# Altium PCB PCB2.PcbDoc (part 1 of 3)
Units mil, origin at the board's own origin, x right, y up, seen from the top; angles counter-clockwise.
Board outline 2598.43 x 2874.02 mil, 2 copper layers (Top Layer, Bottom Layer); 202 components, 116 nets, 598 pads, 319 vias.
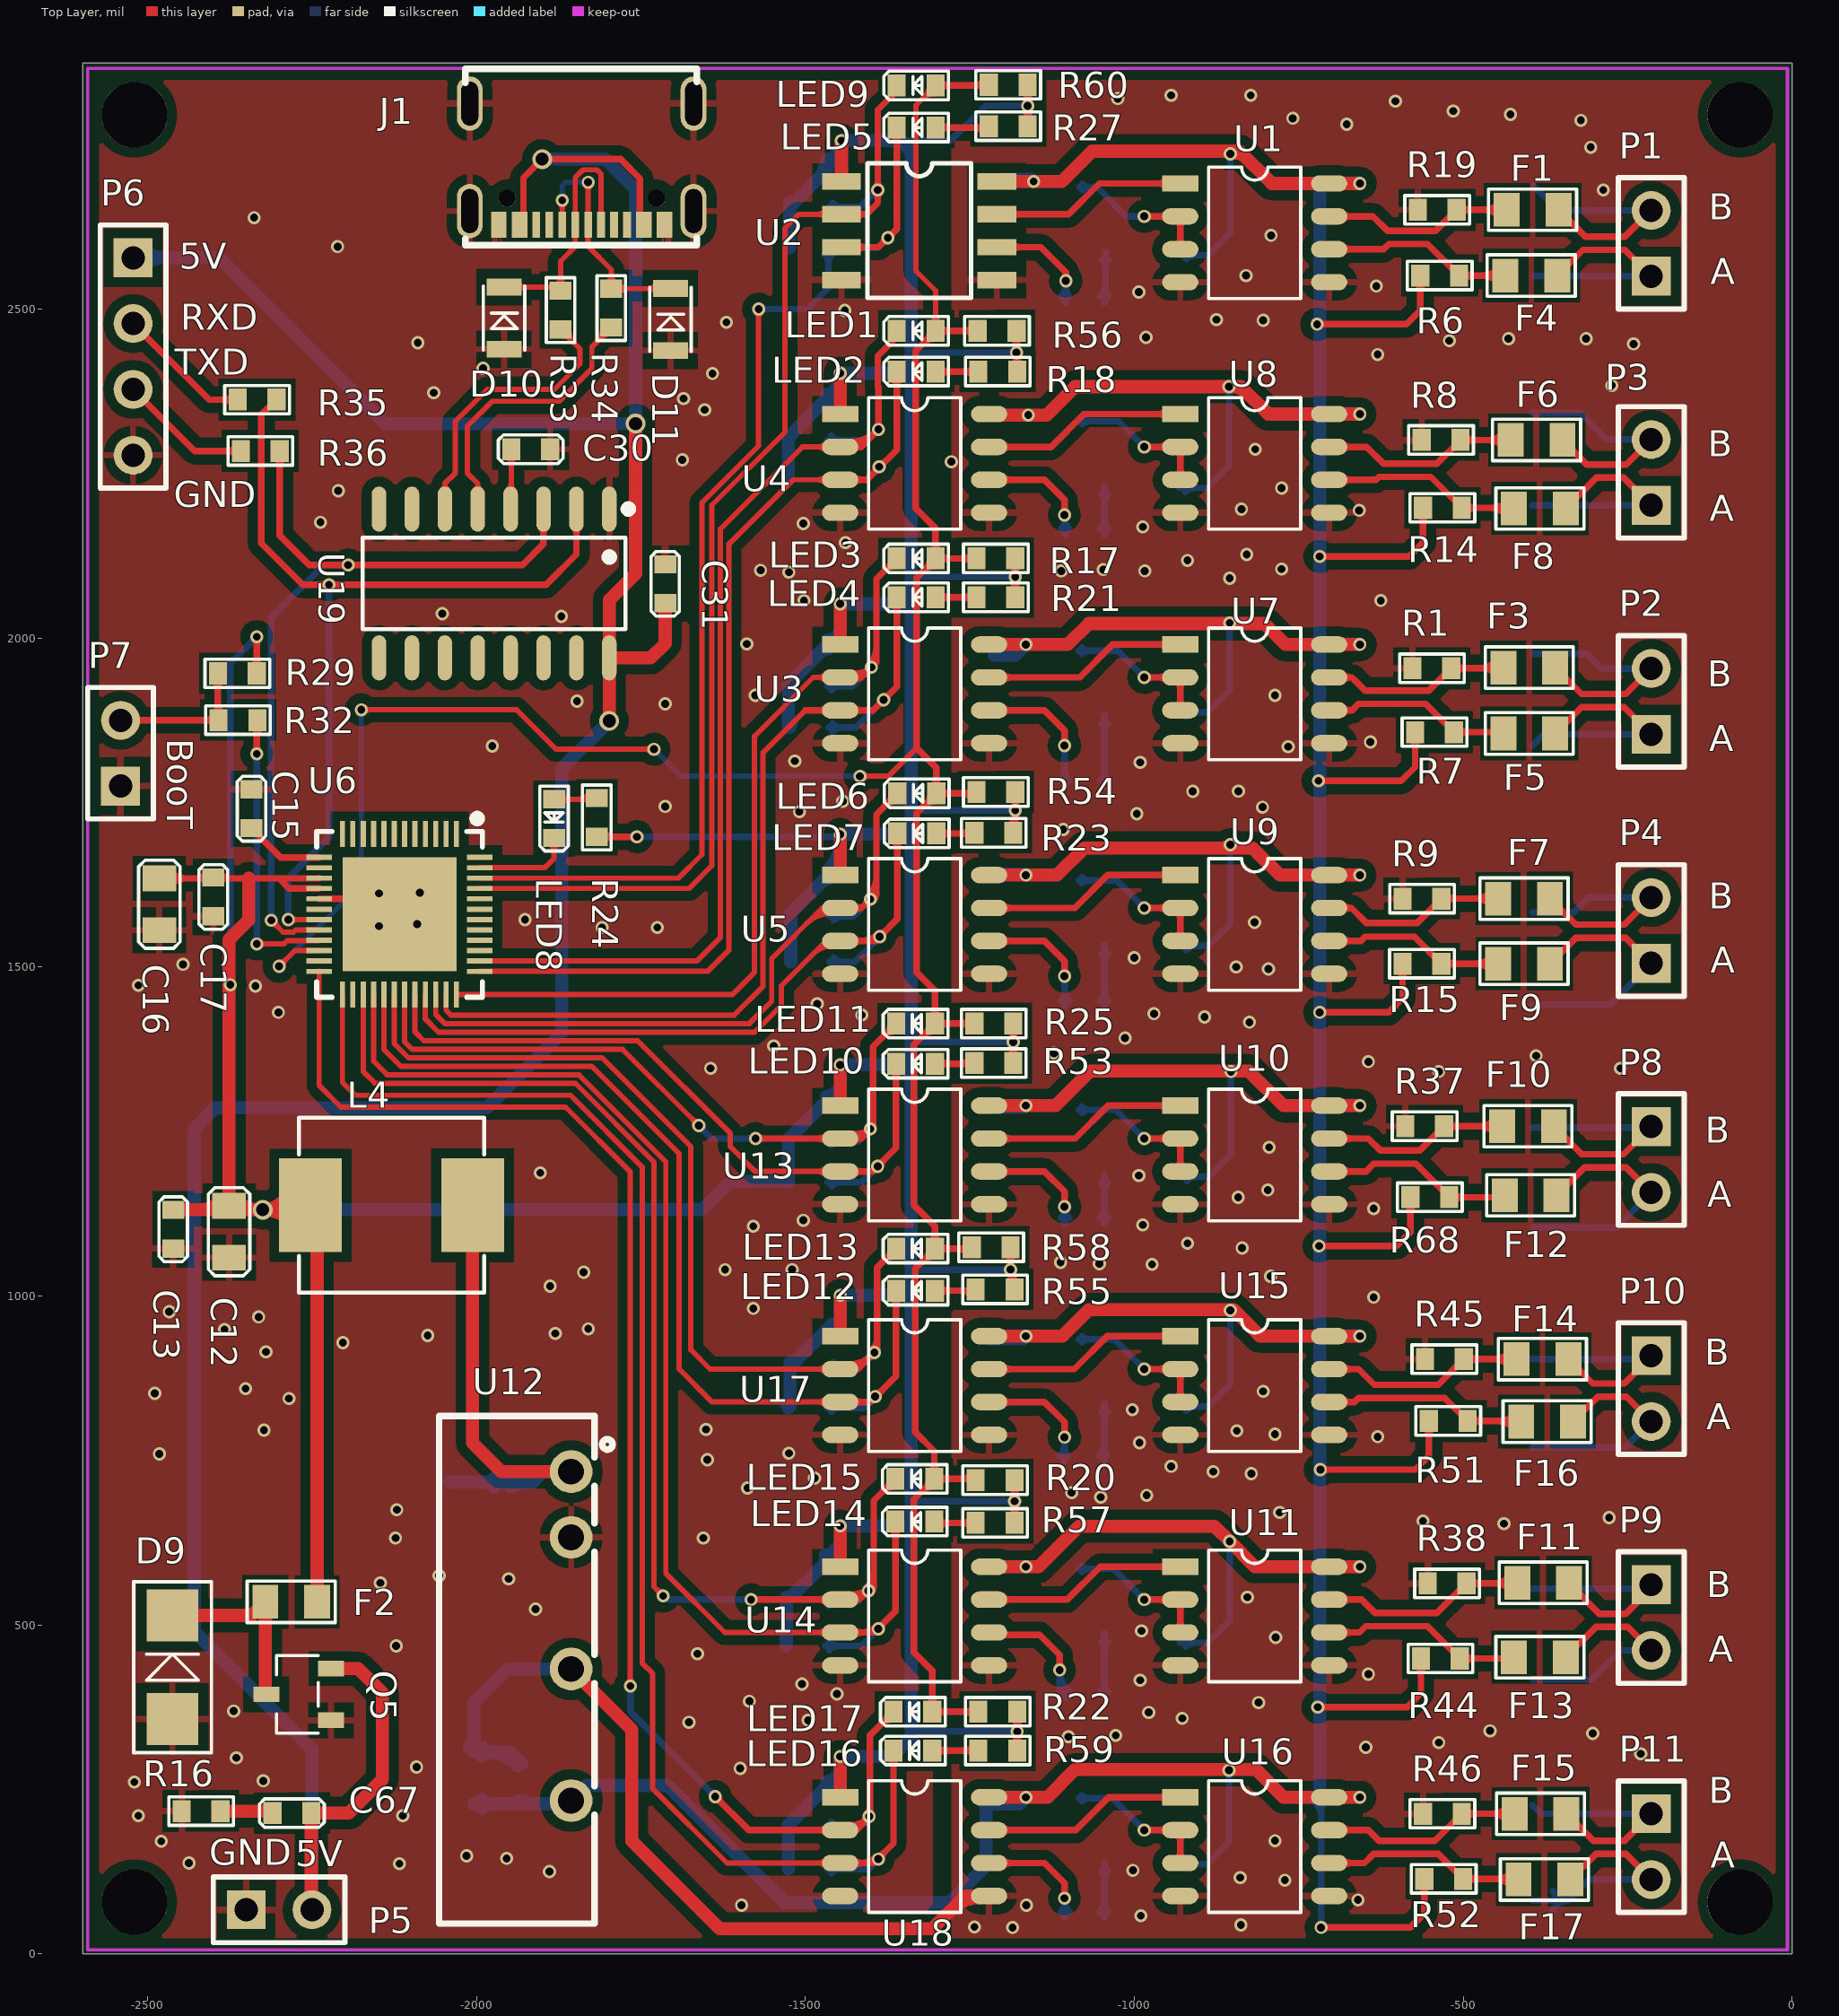
[diagram p0: Top Layer view]
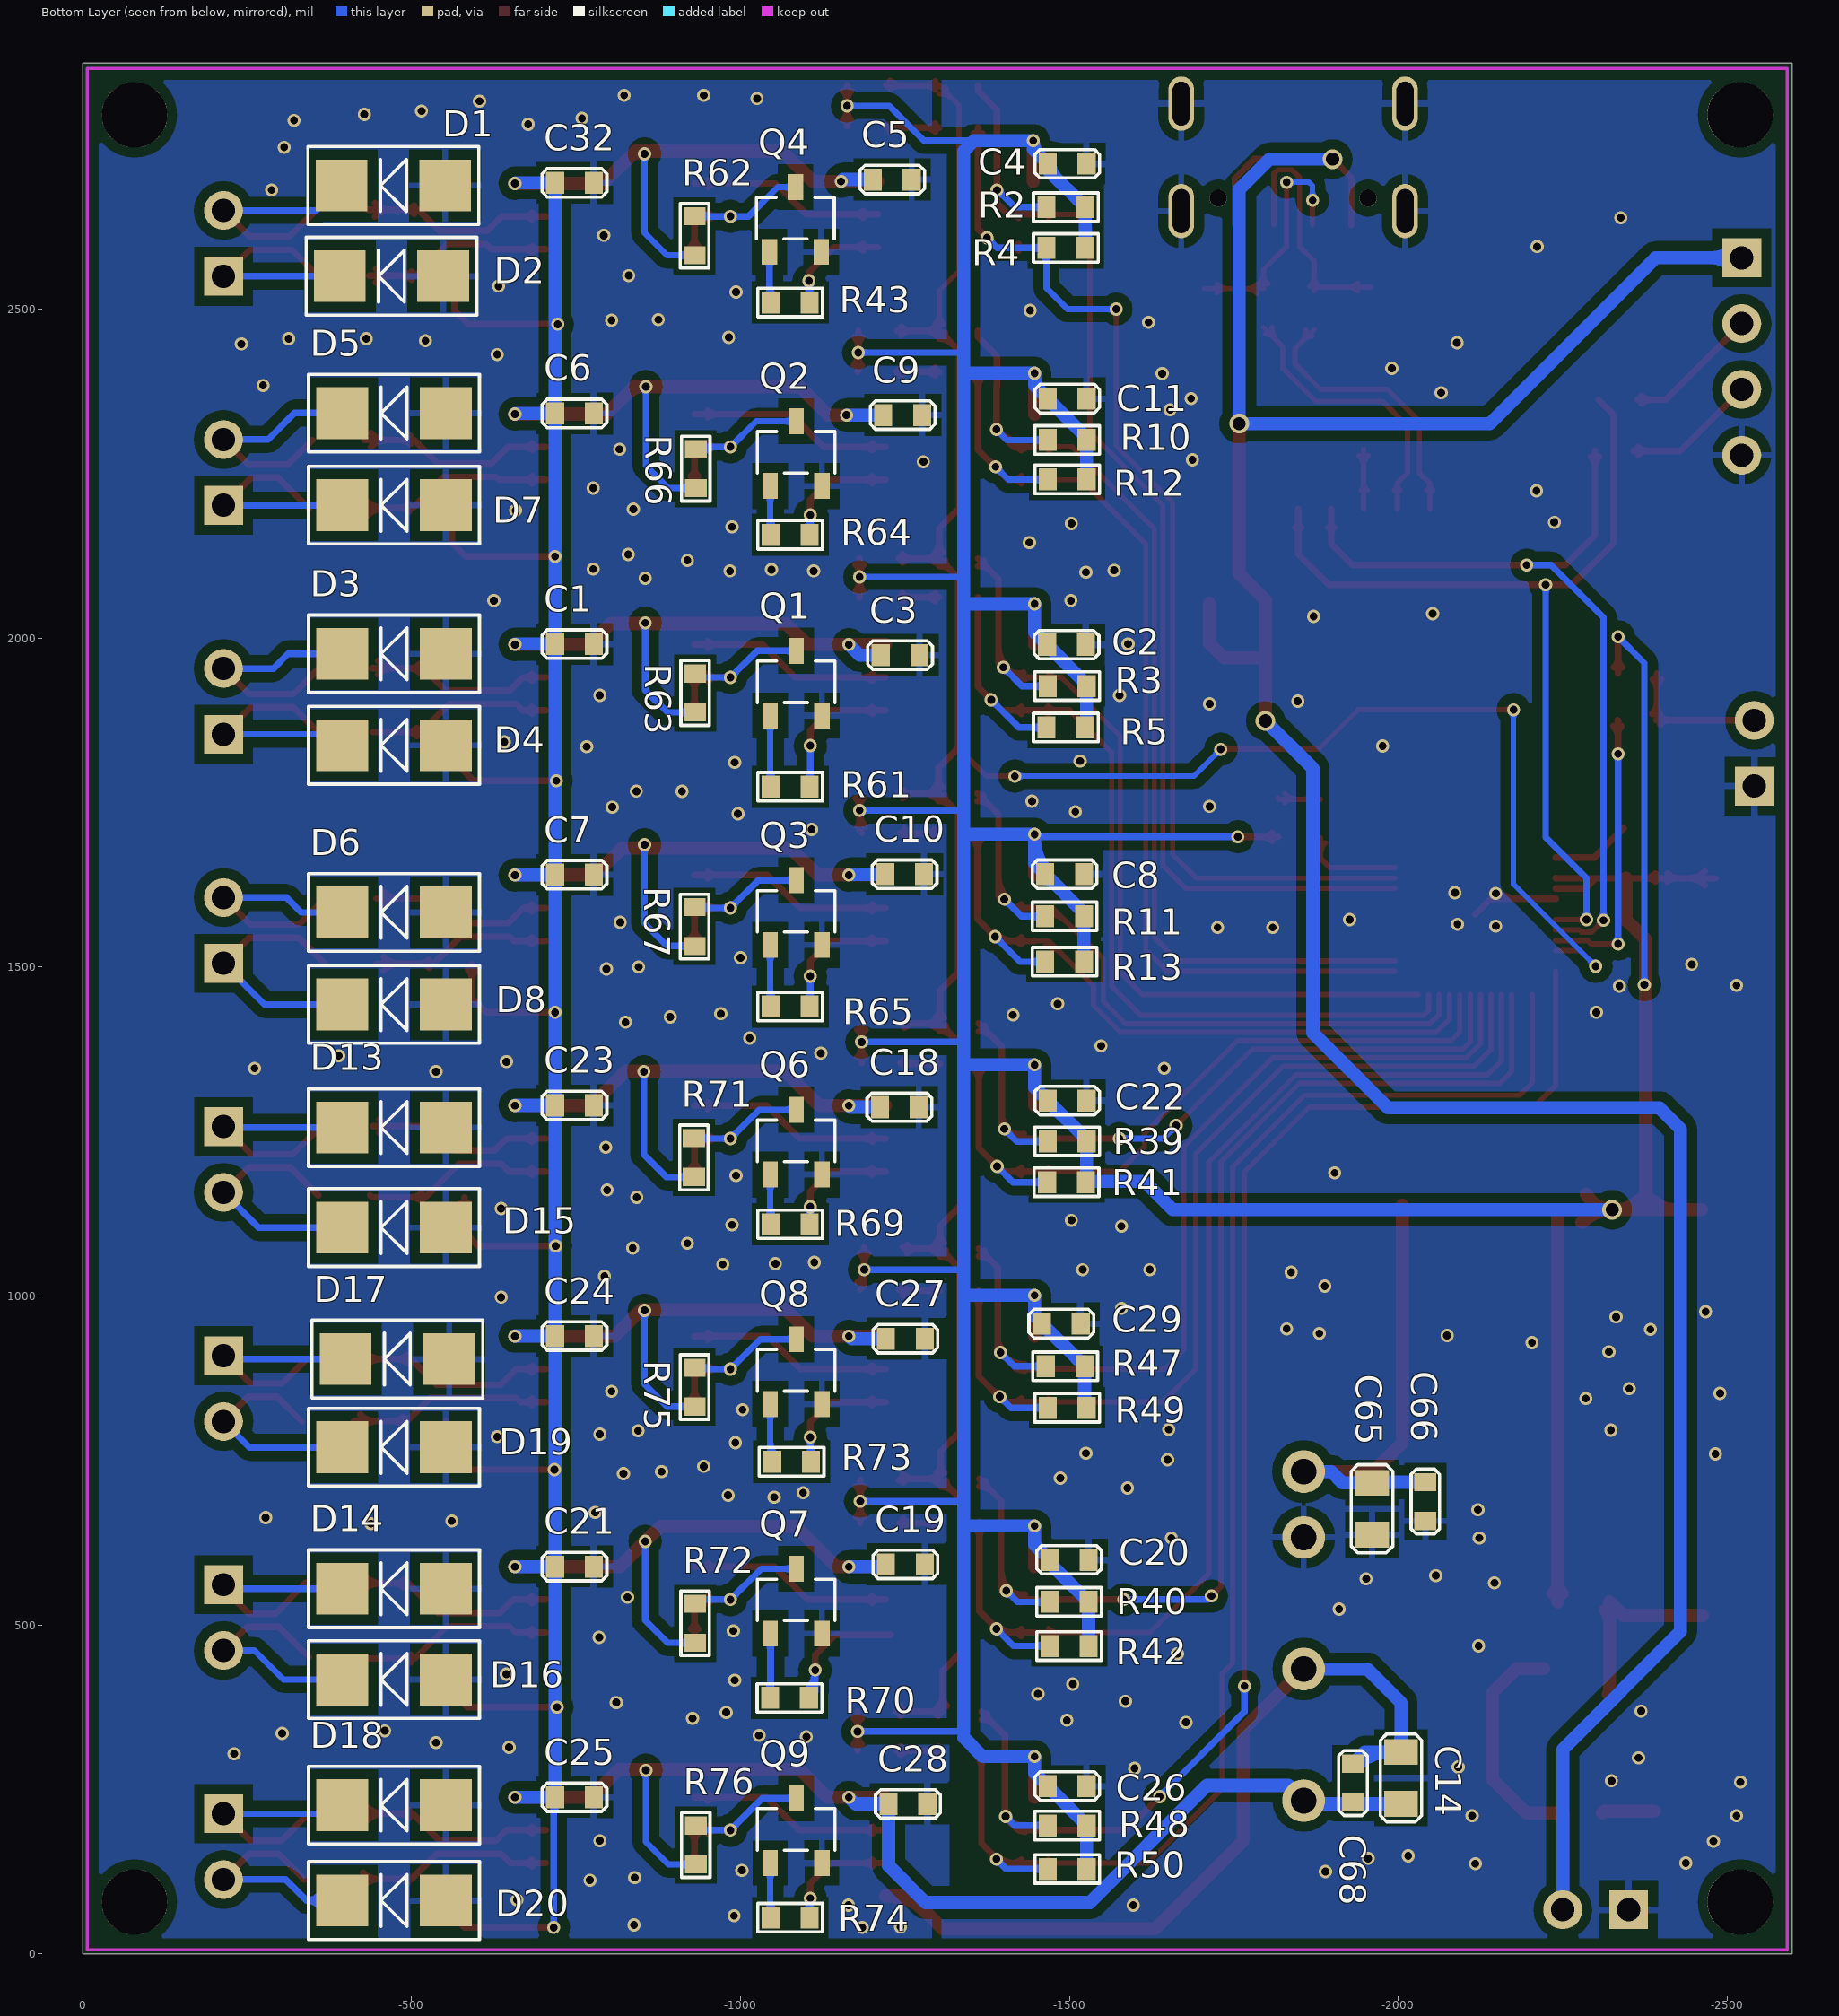
[diagram p1: Bottom Layer view, seen from below]

## Layer stack, top to bottom
Top Layer: signal copper 1.4
Dielectric: dielectric 12.6, FR-4, Dk 4.8
Bottom Layer: signal copper 1.4

## Board outline
-2598.43,0 0,0 0,2874.02 -2598.43,2874.02

## Design rules (kind name [scope] priority, off if disabled: settings)
Clearance Clearance_1 [InPolygon] p1: gap=15
Clearance [All] p2: gap=5
DiffPairsRouting [All] p1: maxlimit=10 minlimit=10 mostfreqgap=10 maxuncoupledlength=500
PolygonConnect PolygonConnect_1 [IsVia] p1: connectstyle=Direct reliefconductorwidth=10 reliefentries=4 polygonreliefangle="90 Angle"
PolygonConnect [All] p2: connectstyle=Relief reliefconductorwidth=10 reliefentries=4 polygonreliefangle="90 Angle"
RoutingVias [All] p1: holewidth=28 width=50 viastyle="Through Hole" minholewidth=28 minwidth=50 maxholewidth=28 maxwidth=50
SilkscreenOverComponentPads [All] p1: minsilkscreentomaskgap=1
SolderMaskExpansion [All] p1: expansion=4
Width [All] p1: maxlimit=200 minlimit=5 preferedwidth=10
26 further rules are at their usual default settings.

## Classes and differential pairs
component class Sheet2: C15 C16 C17 D10 D11 J1 LED1 LED2 LED3 LED4 LED5 LED6 LED7 LED8 LED9 LED10 LED11 LED12 LED13 LED14 LED15 LED16 LED17 P6 P7 R17 R18 R20 R21 R22 R23 R24 R25 R27 R29 R32 R33 R34 R35 R36 R53 R54 R55 R56 R57 R58 R59 R60 U6
component class rs485: C1 C2 C3 C4 C5 C6 C7 C8 C9 C10 C11 C12 C13 C14 C18 C19 C20 C21 C22 C23 C24 C25 C26 C27 C28 C29 C30 C31 C32 C65 C66 C67 C68 C70 D1 D2 D3 D4 D5 D6 D7 D8 D9 D13 D14 D15 D16 D17 D18 D19 D20 F1 F2 F3 F4 F5 F6 F7 F8 F9 F10 F11 F12 F13 F14 F15 F16 F17 L4 P1 P2 P3 P4 P5 P8 P9 P10 P11 Q1 Q2 Q3 Q4 Q5 Q6 Q7 Q8 Q9 R1 R2 R3 R4 R5 R6 R7 R8 R9 R10 R11 R12 R13 R14 R15 R16 R19 R37 R38 R39 R40 R41 R42 R43 R44 R45 R46 R47 R48 R49 R50 R51 R52 R61 R62 R63 R64 R65 R66 R67 R68 R69 R70 R71 R72 R73 R74 R75 R76 U1 U2 U3 U4 U5 U7 U8 U9 U10 U11 U12 U13 U14 U15 U16 U17 U18 U19
differential pair USB: +USB_P -USB_N
differential pair 4851: +4851_P -4851_N
differential pair 4852: +4852_P -4852_N
differential pair 4853: +4853_P -4853_N
differential pair 4854: +4854_P -4854_N
differential pair 4855: +4855_P -4855_N
differential pair 4856: +4856_P -4856_N
differential pair 4857: +4857_P -4857_N
differential pair 4858: +4858_P -4858_N

## Components (designator, comment, footprint, x,y, rotation, side; value= is the part's Value field where it differs from the comment)
C1 "0.1uF/50V/X5R" 0603C -777,1990.86 r0 bottom
C2 "0.1uF/50V/X5R" 0603C -1525,1990 r0 bottom
C3 "0.1uF/50V/X5R" 0603C -1272,1974 r0 bottom
C4 "0.1uF/50V/X5R" 0603C -1526,2721 r0 bottom
C5 "0.1uF/50V/X5R" 0603C -1260,2697 r0 bottom
C6 "0.1uF/50V/X5R" 0603C -777,2341.43 r0 bottom
C7 "0.1uF/50V/X5R" 0603C -777,1640.29 r0 bottom
C8 "0.1uF/50V/X5R" 0603C -1522.06,1641 r0 bottom
C9 "0.1uF/50V/X5R" 0603C -1276,2339 r0 bottom
C10 "0.1uF/50V/X5R" 0603C -1279,1641 r0 bottom
C11 "0.1uF/50V/X5R" 0603C -1526,2364 r0 bottom
C12 "10uF/25V" 0805C -2376,1137 r270 top
C13 "0.1uF" 0603C -2461,1131 r270 top
C14 "10uF/25V" 0805C -2004,228 r90 bottom
C15 "0.1uF" 0603C -2342,1770 r270 top
C16 "22uF/16V/X5R" 0805C -2482,1556 r90 top
C17 "0.1uF/50V/X5R" 0603C -2400,1577 r90 top
C18 "0.1uF/50V/X5R" 0603C -1271,1287 r0 bottom
C19 "0.1uF/50V/X5R" 0603C -1280,592 r0 bottom
C20 "0.1uF/50V/X5R" 0603C -1529,599 r0 bottom
C21 "0.1uF/50V/X5R" 0603C -777,588.57 r0 bottom
C22 "0.1uF/50V/X5R" 0603C -1526,1297 r0 bottom
C23 "0.1uF/50V/X5R" 0603C -777,1289.71 r0 bottom
C24 "0.1uF/50V/X5R" 0603C -777,939.14 r0 bottom
C25 "0.1uF/50V/X5R" 0603C -777,238 r0 bottom
C26 "0.1uF/50V/X5R" 0603C -1526,255 r0 bottom
C27 "0.1uF/50V/X5R" 0603C -1280,935 r0 bottom
C28 "0.1uF/50V/X5R" 0603C -1284,228 r0 bottom
C29 "0.1uF/50V/X5R" 0603C -1517,958 r0 bottom
C30 "0.1uF/50V/X5R" 0603C -1947,2287 r0 top
C31 "0.1uF/50V/X5R" 0603C -1713,2112 r270 top
C32 "0.1uF/50V/X5R" 0603C -777,2692 r0 bottom
C65 "3.3uF" 0805C -1960,716 r270 bottom
C66 "0.1uF" 0603C -2041,717 r270 bottom
C67 "10uF" 0603C -2251,214 r180 top
C68 "0.1uF" 0603C -1931,230 r90 bottom
D1 "SMAJ6.5CA" SMA -551,2688 r0 bottom
D2 "SMAJ6.5CA" SMA -548,2550 r0 bottom
D3 "SMAJ6.5CA" SMA -552,1976 r0 bottom
D4 "SMAJ6.5CA" SMA -552,1837 r0 bottom
D5 "SMAJ6.5CA" SMA -552,2342 r0 bottom
D6 "SMAJ6.5CA" SMA -552,1583 r0 bottom
D7 "SMAJ6.5CA" SMA -552,2202 r0 bottom
D8 "SMAJ6.5CA" SMA -552,1443 r0 bottom
D9 "SMAJ5.0CA" SMA -2462,357 r90 top
D10 "CESDB5V0D3" SOD323 -1958,2439 r90 top
D11 "CESDB5V0D3" SOD323 -1705,2437 r90 top
D13 "SMAJ6.5CA" SMA -552,1256 r0 bottom
D14 "SMAJ6.5CA" SMA -552,555 r0 bottom
D15 "SMAJ6.5CA" SMA -552,1104 r0 bottom
D16 "SMAJ6.5CA" SMA -552,417 r0 bottom
D17 "SMAJ6.5CA" SMA -557,904 r0 bottom
D18 "SMAJ6.5CA" SMA -552,226 r0 bottom
D19 "SMAJ6.5CA" SMA -552,770 r0 bottom
D20 "SMAJ6.5CA" SMA -552,81 r0 bottom
F1 "100mA" 0805R -355,2651 r180 top
F2 "SMD0805P050" 0805R -2321,535 r0 top
F3 "100mA" 0805R -360,1955 r180 top
F4 "100mA" 0805R -357,2551 r180 top
F5 "100mA" 0805R -360,1855 r180 top
F6 "100mA" 0805R -349,2301 r180 top
F7 "100mA" 0805R -368,1604 r180 top
F8 "100mA" 0805R -344,2197 r180 top
F9 "100mA" 0805R -368,1505 r180 top
F10 "100mA" 0805R -362,1258 r180 top
F11 "100mA" 0805R -339,564 r180 top
F12 "100mA" 0805R -358,1153 r180 top
F13 "100mA" 0805R -344,451 r180 top
F14 "100mA" 0805R -340,904 r180 top
F15 "100mA" 0805R -343,213 r180 top
F16 "100mA" 0805R -333,809 r180 top
F17 "100mA" 0805R -337,113 r180 top
J1 "TYPE C_16P" TYPEC_16P -1840,2797 r180 top
L4 "47uH" IND-SMD_L7.0-W6.6_FXL0630 -2129,1138 r180 top
LED1 "LED" 0603LED -1302,2467 r180 top
LED2 "LED" 0603LED -1302,2405 r180 top
LED3 "LED" 0603LED -1302,2121 r180 top
LED4 "LED" 0603LED -1302,2062 r180 top
LED5 "LED" 0603LED -1302,2776 r180 top
LED6 "LED" 0603LED -1301,1764 r180 top
LED7 "LED" 0603LED -1301,1703 r180 top
LED8 "LED" 0603LED -1882,1755 r270 top
LED9 "LED" 0603LED -1302,2840 r180 top
LED10 "LED" 0603LED -1303,1353 r180 top
LED11 "LED" 0603LED -1303,1414 r180 top
LED12 "LED" 0603LED -1303,1008 r180 top
LED13 "LED" 0603LED -1303,1072 r180 top
LED14 "LED" 0603LED -1304,657 r180 top
LED15 "LED" 0603LED -1304,722 r180 top
LED16 "LED" 0603LED -1307,309 r180 top
LED17 "LED" 0603LED -1307,368 r180 top
P1 "Header 2" HDR1X2 -214,2550 r90 top
P2 "Header 2" HDR1X2 -214,1853.71 r90 top
P3 "Header 2" HDR1X2 -214,2201.86 r90 top
P4 "Header 2" HDR1X2 -214,1505.57 r90 top
P5 "Header 2" HDR1X2 -2350,67 r0 top
P6 "Header 4" HDR1X4 -2522,2578 r270 top
P7 "Header 2" HDR1X2 -2541,1775 r90 top
P8 "Header 2" HDR1X2 -214,1257.43 r270 top
P9 "Header 2" HDR1X2 -214,561.14 r270 top
P10 "Header 2" HDR1X2 -214,909.29 r270 top
P11 "Header 2" HDR1X2 -214,213 r270 top
Q1 "S8050" sot23-3 -1045,1882.29 r270 bottom
Q2 "S8050" sot23-3 -1045,2231.14 r270 bottom
Q3 "S8050" sot23-3 -1045,1533.43 r270 bottom
Q4 "S8050" sot23-3 -1044,2587 r270 bottom
Q5 "SI2301" sot23-3 -2221,355 r0 top
Q6 "S8050" sot23-3 -1045,1184.57 r270 bottom
Q7 "S8050" sot23-3 -1045,486.86 r270 bottom
Q8 "S8050" sot23-3 -1045,835.71 r270 bottom
Q9 "S8050" sot23-3 -1045,138 r270 bottom
R1 "10k" 0603r -577,1954 r0 top
R2 "10k" 0603r -1524,2655 r0 bottom
R3 "10k" 0603r -1526,1927 r0 bottom
R4 "10k" 0603r -1524,2593 r0 bottom
R5 "10k" 0603r -1524,1864 r0 bottom
R6 "10k" 0603r -506,2551 r180 top
R7 "10k" 0603r -514,1857 r180 top
R8 "10k" 0603r -563,2301 r0 top
R9 "10k" 0603r -592,1604 r0 top
R10 "10k" 0603r -1526,2301 r0 bottom
R11 "10k" 0603r -1522.06,1577 r0 bottom
R12 "10k" 0603r -1526,2241 r0 bottom
R13 "10k" 0603r -1522.06,1508 r0 bottom
R14 "10k" 0603r -502,2198 r180 top
R15 "10k" 0603r -533,1505 r180 top
R16 "10k" 0603r -2389,217 r180 top
R17 "2K" 0603R -1240,2121 r0 top
R18 "2K" 0603R -1237,2405 r0 top
R19 "10k" 0603r -569,2651 r0 top
R20 "2K" 0603R -1241,720 r0 top
R21 "2K" 0603R -1240,2062 r0 top
R22 "2K" 0603R -1237,368 r0 top
R23 "2K" 0603R -1243,1704 r0 top
R24 "2K" 0603R -1817,1757 r270 top
R25 "2K" 0603R -1243,1414 r0 top
R27 "2K" 0603R -1221,2778 r0 top
R29 "10k" 0603r -2334,1946.35 r180 top
R32 "10k" 0603r -2392,1875.35 r0 top
R33 "10k" 0603r -1872,2469 r90 top
R34 "10k" 0603r -1795,2472 r90 top
R35 "10k" 0603r -2304,2362.35 r180 top
R36 "10k" 0603r -2299,2284.35 r180 top
R37 "10k" 0603r -588,1258 r0 top
R38 "10k" 0603r -554,563 r0 top
R39 "10k" 0603r -1526,1235 r0 bottom
R40 "10k" 0603r -1529,535 r0 bottom
R41 "10k" 0603r -1525,1173 r0 bottom
R42 "10k" 0603r -1529,468 r0 bottom
R43 "10k" 0603r -1105,2510 r0 bottom
R44 "10k" 0603r -505,449 r180 top
R45 "10k" 0603r -558,904 r0 top
R46 "10k" 0603r -561,213 r0 top
R47 "10k" 0603r -1523,893 r0 bottom
R48 "10k" 0603r -1526,195 r0 bottom
R49 "10k" 0603r -1526,830 r0 bottom
R50 "10k" 0603r -1526,129 r0 bottom
R51 "10k" 0603r -493,810 r180 top
R52 "10k" 0603r -500,114 r180 top
R53 "2K" 0603R -1243,1354 r0 top
R54 "2K" 0603R -1240,1766 r0 top
R55 "2K" 0603R -1241,1010 r0 top
R56 "2K" 0603R -1238,2467 r0 top
R57 "2K" 0603R -1241,655 r0 top
R58 "2K" 0603R -1247,1074 r0 top
R59 "2K" 0603R -1237,309 r0 top
R60 "2K" 0603R -1221,2841 r0 top
R61 "10k" 0603r -1105,1774 r0 bottom
R62 "10k" 0603r -930,2641 r270 bottom
R63 "10k" 0603r -931,1946 r270 bottom
R64 "10k" 0603r -1105,2157 r0 bottom
R65 "10k" 0603r -1105,1440 r0 bottom
R66 "10k" 0603r -932,2287 r270 bottom
R67 "10k" 0603r -930,1591 r270 bottom
R68 "10k" 0603r -521,1150 r180 top
R69 "10k" 0603r -1105,1109 r0 bottom
R70 "10k" 0603r -1104,389 r0 bottom
R71 "10k" 0603r -929,1240 r270 bottom
R72 "10k" 0603r -931,532 r270 bottom
R73 "10k" 0603r -1107,748 r0 bottom
R74 "10k" 0603r -1105,55 r0 bottom
R75 "10k" 0603r -930,891 r270 bottom
R76 "10k" 0603r -932,195 r270 bottom
U1 "SP485R" so-8 -930,2691 r0 top
U2 "ADUM1201ARZ-RL7" SO8 -1445.7,2693.73 r0 top
U3 "ADUM1201ARZ-RL7" SO-8 -1447,1990.14 r0 top
U4 "ADUM1201ARZ-RL7" SO-8 -1447,2340.57 r0 top
U5 "ADUM1201ARZ-RL7" SO-8 -1447,1639.71 r0 top
U6 "STC8H8K64U-45I-QFN48" QFN-48_L6.0-W6.0-P0.40-TL-EP4.4 -2117,1580 r270 top
U7 "SP485R" so-8 -930,1990.14 r0 top
U8 "SP485R" so-8 -930,2340.57 r0 top
U9 "SP485R" so-8 -930,1639.71 r0 top
U10 "SP485R" so-8 -930,1289.29 r0 top
U11 "SP485R" so-8 -930,588.43 r0 top
U12 "B0505LS-1W" PWRM-TH_4P-L19.7-W6.0-P2.54 -1856,483 r270 top
U13 "ADUM1201ARZ-RL7" SO-8 -1447,1289.29 r0 top
U14 "ADUM1201ARZ-RL7" SO-8 -1447,588.43 r0 top
U15 "SP485R" so-8 -930,938.86 r0 top
U16 "SP485R" so-8 -930,238 r0 top
U17 "ADUM1201ARZ-RL7" SO-8 -1447,938.86 r0 top
U18 "ADUM1201ARZ-RL7" SO-8 -1447,238 r0 top
U19 "CH340C" SOP-16_L10.0-W3.9-P1.27-LS6.0-BL -1973,2083 r180 top

## Footprints (in the part's own frame and the unit in brackets; to place one, negate y for a bottom-side part, rotate by r counter-clockwise, add the part's x,y. Pads: shape width x height; smd on the part's side, far side on the other; paste and mask are expansions set on the pad)
0603C [mm]
  rect 0.7x0.85 smd: 1(0,0) 2(1.5,0)
  silkscreen extent -0.5,-0.55 2,0.55
0603LED [mm]
  rect 0.7x0.85 smd: 1(0,0) 2(1.5,0)
  silkscreen extent -0.5,-0.55 2,0.55
0603r [mm]
  rect 0.7x0.85 smd: 1(0,0) 2(1.5,0)
  silkscreen extent -0.5,-0.55 2,0.55
0603R [mm]
  rect 0.7x0.85 smd: 1(0,0) 2(1.5,0)
  silkscreen extent -0.5,-0.55 2,0.55
0805C [mm]
  rect 1x1.3 smd: 1(0,0) 2(2,0)
  silkscreen extent -0.7,-0.8 2.7,0.8
0805R [mm]
  rect 1x1.3 smd: 1(0,0) 2(2,0)
  silkscreen extent -0.7,-0.8 2.7,0.8
HDR1X2 [mm] "Connector; Header; 2 Position"
  rect 1.5x1.5 hole 0.9: 1(0,0)
  round 1.5 hole 0.9: 2(2.54,0)
  silkscreen extent -1.27,-1.27 3.81,1.27
HDR1X4 [mm] "Connector; Header; 4 Position"
  rect 1.5x1.5 hole 0.9: 1(0,0)
  round 1.5 hole 0.9: 2(2.54,0) 3(5.08,0) 4(7.62,0)
  silkscreen extent -1.27,-1.27 8.89,1.27
IND-SMD_L7.0-W6.6_FXL0630 [mm]
  rect 2.424x3.62 smd: 1(3.128,0) 2(-3.128,0)
  silkscreen extent -3.58,-3.38 3.58,3.38
PWRM-TH_4P-L19.7-W6.0-P2.54 [mm]
  round 1.65 hole 1 paste+0 mask+0.05: 1(-6.35,0) 2(-3.81,0) 4(1.27,0) 6(6.35,0)
  silkscreen extent -8.5,-5.1 11.1,1.6
QFN-48_L6.0-W6.0-P0.40-TL-EP4.4 [mm]
  rect 1x0.2 smd paste-100 mask+0.05: 1(-3.1,2.2) 2(-3.1,1.8) 3(-3.1,1.4) 4(-3.1,1) 5(-3.1,0.6) 6(-3.1,0.2) 7(-3.1,-0.2) 8(-3.1,-0.6) 9(-3.1,-1) 10(-3.1,-1.4) 11(-3.1,-1.8) 12(-3.1,-2.2) 25(3.1,-2.2) 26(3.1,-1.8) 27(3.1,-1.4) 28(3.1,-1) 29(3.1,-0.6) 30(3.1,-0.2) 31(3.1,0.2) 32(3.1,0.6) 33(3.1,1) 34(3.1,1.4) 35(3.1,1.8) 36(3.1,2.2)
  rect 0.2x1 smd paste-100 mask+0.05: 13(-2.2,-3.1) 14(-1.8,-3.1) 15(-1.4,-3.1) 16(-1,-3.1) 17(-0.6,-3.1) 18(-0.2,-3.1) 19(0.2,-3.1) 20(0.6,-3.1) 21(1,-3.1) 22(1.4,-3.1) 23(1.8,-3.1) 24(2.2,-3.1) 37(2.2,3.1) 38(1.8,3.1) 39(1.4,3.1) 40(1,3.1) 41(0.6,3.1) 42(0.2,3.1) 43(-0.2,3.1) 44(-0.6,3.1) 45(-1,3.1) 46(-1.4,3.1) 47(-1.8,3.1) 48(-2.2,3.1)
  rect 4.4x4.4 smd paste-100 mask+0.05: 49(0.001,0.001)
  silkscreen extent -3.85,-3.2 3.2,3.2
SMA [mm]
  rect 2x2 smd: 1(0,0) 2(4,0)
  silkscreen extent -1.3,-1.5 5.3,1.5
SO8 [mm]
  rect 1.5x0.635 smd: 1(0.018,0.011) 2(0.018,-1.259) 3(0.018,-2.529) 4(0.018,-3.799) 5(6.018,-3.799) 6(6.018,-2.529) 7(6.018,-1.259) 8(6.018,0.011)
  silkscreen extent 1.02,-4.49 5.02,0.71
so-8 [mil]
  rect 55x25 smd: 1(0,0)
  oval 55x25 smd: 2(0,-50) 3(0,-100) 4(0,-150) 5(226.38,-150) 6(226.38,-100) 7(226.38,-50) 8(226.38,0)
  silkscreen extent 43,-175 183,25
SO-8 [mil]
  rect 55x25 smd: 1(0,0)
  oval 55x25 smd: 2(0,-50) 3(0,-100) 4(0,-150) 5(226.38,-150) 6(226.38,-100) 7(226.38,-50) 8(226.38,0)
  silkscreen extent 43,-175 183,25
SOD323 [mm]
  rect 0.65x1.35 smd: 1(0,0) 2(2.4,0)
  silkscreen extent -0.03,-0.8 2.44,0.8
SOP-16_L10.0-W3.9-P1.27-LS6.0-BL [mm]
  oval 0.56x1.745 smd: 1(-4.445,-2.872) 2(-3.175,-2.872) 3(-1.905,-2.872) 4(-0.635,-2.872) 5(0.635,-2.872) 6(1.905,-2.872) 7(3.175,-2.872) 8(4.445,-2.872) 9(4.445,2.872) 10(3.175,2.872) 11(1.905,2.872) 12(0.635,2.872) 13(-0.635,2.872) 14(-1.905,2.872) 15(-3.175,2.872) 16(-4.445,2.872)
  silkscreen extent -5.33,-3.02 5.08,1.77
sot23-3 [mm]
  rect 1x0.6 smd: 1(0,0) 2(0,2) 3(-2.5,1)
  silkscreen extent -2.1,-0.5 -0.5,2.5
TYPEC_16P [mm]
  oval 1x2.1 hole 0.65 slot 1.7 at 90 deg: 1(-4.32,3.759) 1(-4.32,-0.391) 1(4.32,3.759) 1(4.32,-0.391)
  round 0.67 hole 0.67: 2(-2.89,3.259) 2(2.89,3.259)
  rect 0.3x1 smd: A1(-3.05,4.293) A4(-2.25,4.293) A5(-1.25,4.293) A6(-0.25,4.293) A7(0.25,4.293) A8(1.25,4.293) A9(2.25,4.293) A12(3.35,4.293) B1(3.05,4.293) B4(2.55,4.293) B5(1.75,4.293) B6(0.75,4.293) B7(-0.75,4.293) B8(-1.75,4.293) B9(-2.55,4.293) B12(-3.35,4.293)
  silkscreen extent -4.45,-1.73 4.49,5.07

## Part data
C1 C2 C3 C4 C5 C6 C7 C8 C9 C10 C11 C16 C17 C18 C19 C20 C21 C22 C23 C24 C25 C26 C27 C28 C29 C30 C31 C32: library part CAP4, "贴片电容 20%"
C12 C13 C14 C15 C65 C66 C67 C68: library part CAP, "Capacitor"
D1 D2 D3 D4 D5 D6 D7 D8 D9 D10 D11 D13 D14 D15 D16 D17 D18 D19 D20: library part "DIODE S", "Schottky Diode"
F1 F3 F4 F5 F6 F7 F8 F9 F10 F11 F12 F13 F14 F15 F16 F17: library part RES2
F2: library part "Fuse 2", "Fuse"
L4: library part INDUCTOR
P1 P2 P3 P4 P5 P7 P8 P9 P10 P11: "Header, 2-Pin"
P6: "Header, 4-Pin"
Q1 Q2 Q3 Q4 Q6 Q7 Q8 Q9: library part NPN, "NPN Bipolar Transistor"
Q5: library part MOSFET-P, "P-Channel MOSFET"
R1 R2 R3 R4 R5 R6 R7 R8 R9 R10 R11 R12 R13 R14 R15 R16 R19 R29 R32 R33 R34 R35 R36 R37 R38 R39 R40 R41 R42 R43 R44 R45 R46 R47 R48 R49 R50 R51 R52 R61 R62 R63 R64 R65 R66 R67 R68 R69 R70 R71 R72 R73 R74 R75 R76: library part Resistor_0603
R17 R18 R20 R21 R22 R23 R24 R25 R27 R53 R54 R55 R56 R57 R58 R59 R60: library part RES1
U1 U7 U8 U9 U10 U11 U15 U16: library part SN65HVD06D
U12: library part B0505S

## Free pads (board coordinates)
  round 99.61 hole 99.61 unplated: 0(-2519.68,78.74) 0(-2519.68,2795.28) 0(-78.74,78.74) 0(-78.74,2795.28)

## Via types
v1: diameter 20, hole 12, Top Layer to Bottom Layer, tented both sides, 315 vias
v2: diameter 30, hole 20, Top Layer to Bottom Layer, tented both sides, 4 vias

## Nets (pads, with @x,y where several pads share a name; then routed paths per layer and width w, separated by ;. In a path a pad name is that pad's centre, name@x,y a point inside that pad or via, vN(x,y) a via of type N, cw(c..) or ccw(c..) an arc to the next point about the centre after c; other vN are vias at no path point)
5V_OUT1: C2.2 C4.2 C8.2 C11.2 C12.1 C13.1 C16.2 C17.2 C20.2 C22.2 C26.2 C29.2 F2.2 L4.1 R2.1 R3.1 R4.1 R5.1 R10.1 R11.1 R12.1 R13.1 R17.2 R18.2 R20.2 R21.2 R22.2 R23.2 R24.2 R25.2 R27.2 R29.1 R39.1 R40.1 R41.1 R42.1 R47.1 R48.1 R49.1 R50.1 R53.2 R54.2 R55.2 R56.2 R57.2 R58.2 R59.2 R60.2 U2.1 U3.1 U4.1 U5.1 U6.15 U6.16 U13.1 U14.1 U17.1 U18.1 | length 12473.1
  Top Layer w10: C16.2@-2482,1634.74 -2346,1634.74 -2300,1634.74 ; C16.2@-2465.71,1624.36 cw(c-2440.64,1599.29) -2440.64,1634.74 cw(c-2440.64,1670.19) C16.2@-2465.71,1645.12 ; -2427.32,1634.74 ccw(c-2427.32,1660.43) C17.2@-2409.16,1642.26 ; -2420.97,1634.74 cw(c-2420.97,1618.03) C17.2@-2409.16,1629.85 ; C17.2@-2390.84,1629.85 cw(c-2379.03,1618.03) -2379.03,1634.74 ; C17.2@-2390.84,1642.26 ccw(c-2372.68,1660.43) -2372.68,1634.74 ; R29.1@-2340.21,1955.51 ccw(c-2355.2,1970.49) -2334,1970.49 ccw(c-2312.8,1970.49) R29.1@-2327.79,1955.51 ; v1@-2337.54,1998.46 cw(c-2346.07,1989.93) -2334,1989.93 cw(c-2321.93,1989.93) v1@-2330.46,1998.46 ; R29.1@-2334,1946.35 v1(-2334,2002) ; U6.16@-2239.05,1619.38 -2284.63,1619.38 -2300,1634.74 ; U6.15@-2239.05,1635.12 -2239.43,1634.74 -2300,1634.74 ; R24.2@-1817,1697.94 v1(-1755.94,1697.94) ; R24.2@-1807.84,1691.74 cw(c-1792.85,1676.75) -1792.85,1697.94 cw(c-1792.85,1719.14) R24.2@-1807.84,1704.15 ; v1@-1759.48,1694.41 ccw(c-1768.02,1685.87) -1768.02,1697.94 ccw(c-1768.02,1710.02) v1@-1759.48,1701.48 ; R58.2@-1194.15,1064.84 cw(c-1209.14,1049.85) -1187.94,1049.85 cw(c-1166.75,1049.85) R58.2@-1181.74,1064.84 ; v1@-1191.48,1036.46 cw(c-1200.02,1027.93) -1187.94,1027.93 cw(c-1175.87,1027.93) v1@-1184.41,1036.46 ; v1@-1191.48,1043.54 ccw(c-1200.02,1052.07) -1187.94,1052.07 ccw(c-1175.87,1052.07) v1@-1184.41,1043.54 ; R53.2@-1190.15,1363.16 ccw(c-1205.14,1378.15) -1183.94,1378.15 ccw(c-1162.75,1378.15) R53.2@-1177.74,1363.16 ; R25.2@-1190.15,1404.84 cw(c-1205.14,1389.85) -1183.94,1389.85 cw(c-1162.75,1389.85) R25.2@-1177.74,1404.84 ; R23.2@-1190.15,1713.16 ccw(c-1212.38,1735.39) v1@-1180.94,1735.39 ; R57.2@-1188.15,664.16 ccw(c-1203.14,679.15) -1181.94,679.15 ccw(c-1160.75,679.15) R57.2@-1175.74,664.16 ; R20.2@-1188.15,710.84 cw(c-1203.14,695.85) -1181.94,695.85 cw(c-1160.75,695.85) R20.2@-1175.74,710.84 ; R58.2@-1187.94,1074 v1(-1187.94,1040) ; v1@-1187.48,1382.46 cw(c-1196.02,1373.93) -1183.94,1373.93 cw(c-1171.87,1373.93) v1@-1180.41,1382.46 ; v1@-1187.48,1389.54 ccw(c-1196.02,1398.07) -1183.94,1398.07 ccw(c-1171.87,1398.07) v1@-1180.41,1389.54 ; R54.2@-1187.15,1756.84 cw(c-1202.14,1741.85) -1180.94,1741.85 cw(c-1159.75,1741.85) R54.2@-1174.74,1756.84 ; R21.2@-1187.15,2071.16 ccw(c-1202.14,2086.15) -1180.94,2086.15 ccw(c-1159.75,2086.15) R21.2@-1174.74,2071.16 ; R17.2@-1187.15,2111.84 cw(c-1202.14,2096.85) -1180.94,2096.85 cw(c-1159.75,2096.85) R17.2@-1174.74,2111.84 ; v1@-1185.48,684.46 cw(c-1194.02,675.93) -1181.94,675.93 cw(c-1169.87,675.93) v1@-1178.41,684.46 ; v1@-1185.48,691.54 ccw(c-1194.02,700.07) -1181.94,700.07 ccw(c-1169.87,700.07) v1@-1178.41,691.54 ; R56.2@-1185.15,2457.84 cw(c-1200.14,2442.85) -1178.94,2442.85 cw(c-1157.75,2442.85) R56.2@-1172.74,2457.84 ; v1@-1184.48,1734.46 cw(c-1193.02,1725.93) -1180.94,1725.93 cw(c-1168.87,1725.93) v1@-1177.41,1734.46 ; v1@-1184.48,1741.54 ccw(c-1193.02,1750.07) -1180.94,1750.07 ccw(c-1168.87,1750.07) v1@-1177.41,1741.54 ; v1@-1184.48,2089.46 cw(c-1193.02,2080.93) -1180.94,2080.93 cw(c-1168.87,2080.93) v1@-1177.41,2089.46 ; v1@-1184.48,2096.54 ccw(c-1193.02,2105.07) -1180.94,2105.07 ccw(c-1168.87,2105.07) v1@-1177.41,2096.54 ; R59.2@-1184.15,318.16 ccw(c-1199.14,333.15) -1177.94,333.15 ccw(c-1156.75,333.15) R59.2@-1171.74,318.16 ; R22.2@-1184.15,358.84 cw(c-1199.14,343.85) -1177.94,343.85 cw(c-1156.75,343.85) R22.2@-1171.74,358.84 ; R18.2@-1184.15,2414.16 ccw(c-1196.73,2426.73) v1@-1178.94,2426.73 ; R53.2@-1183.94,1354 v1(-1183.94,1386) R25.2@-1183.94,1414 ; R23.2@-1183.94,1704 -1180.94,1707 v1(-1180.94,1738) R54.2@-1180.94,1766 ; v1@-1182.48,2430.46 cw(c-1191.02,2421.93) -1178.94,2421.93 cw(c-1166.87,2421.93) v1@-1175.41,2430.46 ; v1@-1182.48,2437.54 ccw(c-1191.02,2446.07) -1178.94,2446.07 ccw(c-1166.87,2446.07) v1@-1175.41,2437.54 ; R57.2@-1181.94,655 v1(-1181.94,688) R20.2@-1181.94,720 ; R55.2@-1181.94,1010 -1187.94,1016 v1(-1187.94,1040) ; v1@-1181.48,334.46 cw(c-1190.02,325.93) -1177.94,325.93 cw(c-1165.87,325.93) v1@-1174.41,334.46 ; v1@-1181.48,341.54 ccw(c-1190.02,350.07) -1177.94,350.07 ccw(c-1165.87,350.07) v1@-1174.41,341.54 ; -1180.94,1720.91 ccw(c-1169.99,1720.91) R23.2@-1177.74,1713.16 ; R21.2@-1180.94,2062 v1(-1180.94,2093) R17.2@-1180.94,2121 ; v1@-1178.94,2431.56 ccw(c-1154.34,2431.56) R18.2@-1171.74,2414.16 ; R56.2@-1178.94,2467 v1(-1178.94,2434) -1178.94,2406 R18.2@-1177.94,2405 ; R59.2@-1177.94,309 v1(-1177.94,338) R22.2@-1177.94,368 ; R55.2@-1177.2,1020.34 cw(c-1164.59,1040) v1(-1187.94,1040) ; R27.2@-1168.15,2787.16 ccw(c-1183.14,2802.15) -1161.94,2802.15 ccw(c-1140.75,2802.15) R27.2@-1155.74,2787.16 ; R60.2@-1168.15,2831.84 cw(c-1183.14,2816.85) -1161.94,2816.85 cw(c-1140.75,2816.85) R60.2@-1155.74,2831.84 ; v1@-1165.48,2805.46 cw(c-1174.02,2796.93) -1161.94,2796.93 cw(c-1149.87,2796.93) v1@-1158.41,2805.46 ; v1@-1165.48,2812.54 ccw(c-1174.02,2821.07) -1161.94,2821.07 ccw(c-1149.87,2821.07) v1@-1158.41,2812.54 ; R27.2@-1161.94,2778 v1(-1161.94,2809) R60.2@-1161.94,2841
  Top Layer w20: C13.1@-2461,1131 v2(-2325,1131) ; -2419.77,1131 ccw(c-2419.77,1174.87) C12.1@-2388.75,1143.85 ; C12.1@-2382.85,1143.85 ccw(c-2399.38,1160.38) -2376,1160.38 ccw(c-2352.62,1160.38) C12.1@-2369.15,1143.85 ; C12.1@-2376,1137 -2376,1541.36 -2346,1571.36 -2346,1634.74 ; C12.1@-2363.25,1143.85 ccw(c-2332.23,1174.87) v2@-2332.23,1131 ; L4.1@-2285.78,1155.07 cw(c-2325,1174.98) v2(-2325,1131) ; L4.1@-2279.16,1111.67 ccw(c-2325,1066.98) v2(-2325,1131) ; F2.2@-2249.11,547.75 ccw(c-2265.64,564.29) -2242.26,564.29 ccw(c-2218.88,564.29) F2.2@-2235.41,547.75 ; F2.2@-2242.26,535 -2242.26,1128.11 -2245.15,1131 -2252.15,1131 v2(-2325,1131) ; U18.1@-1447,238 v1(-1447,300) ; U14.1@-1447,588.43 v1(-1447,650.43) ; U17.1@-1447,938.86 v1(-1447,1000.86) ; U13.1@-1447,1289.29 v1(-1447,1351.29) ; U5.1@-1447,1639.71 v1(-1447,1701.71) ; U3.1@-1447,1990.14 v1(-1447,2052.14) ; U4.1@-1447,2340.57 v1(-1447,2402.57) ; U2.1@-1444.97,2694.17 v1(-1444.97,2756.17)
  Bottom Layer w10: v1@-2377.54,1476.54 ccw(c-2386.07,1485.07) -2374,1485.07 ccw(c-2361.93,1485.07) v1@-2370.46,1476.54 ; v1(-2374,1473) -2374,1962 v1(-2334,2002) ; v1@-2339,2002 cw(c-2351.07,2002) -2342.54,1993.46 cw(c-2334,1984.93) v1@-2334,1997 ; v1(-1755.94,1697.94) -1450.77,1697.94 v1(-1447,1701.71) ; v1@-1752.41,1694.41 cw(c-1743.87,1685.87) -1743.87,1697.94 cw(c-1743.87,1710.02) v1@-1752.41,1701.48 ; -1355.17,2756.17 -1278.83,2756.17 -1226,2809 v1(-1161.94,2809) ; -1339,338 v1(-1177.94,338) ; -1339,1040 v1(-1187.94,1040) ; -1338,688 v1(-1181.94,688) ; -1338,1738 v1(-1180.94,1738) ; -1338,2434 v1(-1178.94,2434) ; -1337,2093 v1(-1180.94,2093) ; -1334,1386 v1(-1183.94,1386) ; v1@-1191.48,1036.46 ccw(c-1200.02,1027.93) -1200.02,1040 ccw(c-1200.02,1052.07) v1@-1191.48,1043.54 ; v1@-1187.48,1382.46 ccw(c-1196.02,1373.93) -1196.02,1386 ccw(c-1196.02,1398.07) v1@-1187.48,1389.54 ; v1@-1185.48,684.46 ccw(c-1194.02,675.93) -1194.02,688 ccw(c-1194.02,700.07) v1@-1185.48,691.54 ; v1@-1184.48,1734.46 ccw(c-1193.02,1725.93) -1193.02,1738 ccw(c-1193.02,1750.07) v1@-1184.48,1741.54 ; v1@-1184.48,2089.46 ccw(c-1193.02,2080.93) -1193.02,2093 ccw(c-1193.02,2105.07) v1@-1184.48,2096.54 ; v1@-1182.48,2430.46 ccw(c-1191.02,2421.93) -1191.02,2434 ccw(c-1191.02,2446.07) v1@-1182.48,2437.54 ; v1@-1181.48,334.46 ccw(c-1190.02,325.93) -1190.02,338 ccw(c-1190.02,350.07) v1@-1181.48,341.54 ; v1@-1165.48,2805.46 ccw(c-1174.02,2796.93) -1174.02,2809 ccw(c-1174.02,2821.07) v1@-1165.48,2812.54
  Bottom Layer w20: v2(-2325,1131) -1657,1131 -1614,1174 R41.1@-1526,1174 ; R42.1@-1529,468 R40.1@-1529,535 -1469.94,594.06 C20.2@-1469.94,599 -1447,621.94 v1(-1447,650.43) -1340.57,650.43 ; R40.1@-1529,541.73 ccw(c-1529,557.99) R40.1@-1517.51,546.49 ; R49.1@-1528.67,835.63 ccw(c-1542.37,849.32) -1523,849.32 ; R50.1@-1526,129 R48.1@-1526,195 ; R48.1@-1526,195.94 C26.2@-1466.94,255 -1447,274.94 v1(-1447,300) -1368,300 -1339,329 ; R49.1@-1526,830 -1523,833 R47.1@-1523,893 -1522.94,893 C29.2@-1457.94,958 ; -1526,1880.91 ccw(c-1510.05,1880.91) R5.1@-1521.33,1869.63 ; R12.1@-1526,2241 R10.1@-1526,2301 ; R10.1@-1526,2304.94 C11.2@-1466.94,2364 -1447,2383.94 v1(-1447,2402.57) ; R41.1@-1525,1173 R41.1@-1526,1174 ; R5.1@-1524,1864 -1526,1866 R3.1@-1526,1927 -1526,1929.94 C2.2@-1465.94,1990 -1447,2008.94 v1(-1447,2052.14) -1339.86,2052.14 ; R4.1@-1524,2593 R2.1@-1524,2655 -1466.94,2712.06 C4.2@-1466.94,2721 -1444.97,2742.97 ; R2.1@-1524,2661.73 ccw(c-1524,2677.99) R2.1@-1512.51,2666.49 ; R47.1@-1523,899.73 ccw(c-1523,916.12) R47.1@-1511.41,904.53 ; R13.1@-1522.06,1508 R11.1@-1522.06,1577 ; R11.1@-1522.06,1581.94 C8.2@-1463,1641 -1447,1657 v1(-1447,1701.71) -1339.29,1701.71 ; C26.2@-1478.44,243.51 cw(c-1466.94,232.01) C26.2@-1466.94,248.27 ; C22.2@-1478.44,1285.51 cw(c-1466.94,1274.01) C22.2@-1466.94,1290.27 ; C11.2@-1478.44,2352.51 cw(c-1466.94,2341.01) C11.2@-1466.94,2357.27 ; -1477.63,2701.37 ccw(c-1494.32,2718.05) C4.2@-1470.72,2718.05 ; C2.2@-1477.44,1978.51 cw(c-1465.94,1967.01) C2.2@-1465.94,1983.27 ; C8.2@-1474.49,1629.51 cw(c-1463,1618.01) C8.2@-1463,1634.27 ; C20.2@-1469.94,605.73 ccw(c-1469.94,621.99) C20.2@-1458.45,610.49 ; C29.2@-1469.44,946.51 cw(c-1457.94,935.01) C29.2@-1457.94,951.27 ; C26.2@-1466.94,261.73 ccw(c-1466.94,277.99) C26.2@-1455.45,266.49 ; C22.2@-1466.94,1303.73 ccw(c-1466.94,1319.99) C22.2@-1455.45,1308.49 ; C11.2@-1466.94,2370.73 ccw(c-1466.94,2386.99) C11.2@-1455.45,2375.49 ; C4.2@-1466.94,2727.73 ccw(c-1466.94,2743.99) C4.2@-1455.45,2732.49 ; C2.2@-1465.94,1996.73 ccw(c-1465.94,2012.99) C2.2@-1454.45,2001.49 ; C8.2@-1465.67,1646.63 ccw(c-1510.75,1691.7) -1447,1691.7 ; C11.2@-1457.63,2373.31 ccw(c-1483.64,2399.33) v1(-1447,2402.57) ; C4.2@-1454.3,2733.64 ccw(c-1476.82,2756.17) v1(-1444.97,2756.17) -1355.17,2756.17 -1339,2740 -1339,1040 -1339,999 -1339,338 ; C29.2@-1447,968.94 v1@-1447,996 ; v1(-1447,1000.86) -1340.86,1000.86 ; -1343.57,2402.57 v1(-1447,2402.57) ; -1339.29,1351.29 v1(-1447,1351.29) -1447,1316.94 C22.2@-1466.94,1297 -1526,1237.94 R39.1@-1526,1235 R41.1@-1526,1174
4851_N: D1.2 F1.1 P1.2 | length 369.8
  Top Layer w10: F1.1@-355,2651 -314,2610 -254,2610 P1.2@-214,2650
  Bottom Layer w10: D1.2@-393.52,2688 -355.52,2650 P1.2@-214,2650
4851_P: D2.2 F4.1 P1.1 | length 352.2
  Top Layer w10: F4.1@-357,2551 -318,2590 -254,2590 P1.1@-214,2550
  Bottom Layer w10: D2.2@-390.52,2550 P1.1@-214,2550
4852_N: D5.2 F6.1 P3.2 | length 363.2
  Top Layer w10: F6.1@-349,2301 -312,2264 -281,2264 -251.86,2264 P3.2@-214,2301.86
  Bottom Layer w10: D5.2@-394.52,2342 -322,2342 -281.86,2301.86 P3.2@-214,2301.86
4852_P: D7.2 F8.1 P3.1 | length 347.5
  Top Layer w10: F8.1@-344,2197 -297,2244 -281,2244 -256.14,2244 P3.1@-214,2201.86
  Bottom Layer w10: D7.2@-394.52,2202 -394.38,2201.86 P3.1@-214,2201.86
4853_N: D3.2 F3.1 P2.2 | length 368.4
  Top Layer w10: F3.1@-360,1955 -320,1915 -290,1915 -252.71,1915 P2.2@-214,1953.71
  Bottom Layer w10: D3.2@-394.52,1976 -312,1976 -289.71,1953.71 P2.2@-214,1953.71
4853_P: D4.2 F5.1 P2.1 | length 367.1
  Top Layer w10: F5.1@-360,1855 -320,1895 -290,1895 -255.29,1895 P2.1@-214,1853.71
  Bottom Layer w10: D4.2@-394.52,1837 -377.81,1853.71 P2.1@-214,1853.71
4854_N: D6.2 F7.1 P4.2 | length 377.2
  Top Layer w10: F7.1@-368,1604 -328.5,1564.5 -283,1564.5 -255.07,1564.5 P4.2@-214,1605.57
  Bottom Layer w10: D6.2@-394.52,1583 -332,1583 -309.43,1605.57 P4.2@-214,1605.57
4854_P: D8.2 F9.1 P4.1 | length 392.9
  Top Layer w10: F9.1@-368,1505 -328.5,1544.5 -283,1544.5 -252.93,1544.5 P4.1@-214,1505.57
  Bottom Layer w10: D8.2@-394.52,1443 -276.57,1443 P4.1@-214,1505.57
4855_N: D13.2 F10.1 P8.1 | length 364.1
  Top Layer w10: F10.1@-362,1258 -319.5,1215.5 -288,1215.5 -255.93,1215.5 P8.1@-214,1257.43
  Bottom Layer w10: D13.2@-394.52,1256 -215.43,1256 P8.1@-214,1257.43
4855_P: D15.2 F12.1 P8.2 | length 380
  Top Layer w10: F12.1@-358,1153 -315.5,1195.5 -288,1195.5 -252.07,1195.5 P8.2@-214,1157.43
  Bottom Layer w10: D15.2@-394.52,1104 -267.43,1104 P8.2@-214,1157.43
4856_N: D17.2 F14.1 P10.1 | length 347.3
  Top Layer w10: F14.1@-340,904 -303,867 -275,867 -255,867 -214,908 P10.1@-214,909.29
  Bottom Layer w10: D17.2@-399.52,904 -219.29,904 P10.1@-214,909.29
4856_P: D19.2 F16.1 P10.2 | length 347.2
  Top Layer w10: F16.1@-333,809 -295,847 -275,847 -251.71,847 P10.2@-214,809.29
  Bottom Layer w10: D19.2@-394.52,770 -253.29,770 P10.2@-214,809.29
4857_N: D14.2 F11.1 P9.1 | length 349.4
  Top Layer w10: F11.1@-339,564 -314,539 -314,538 -293,517 -273,517 -253,517 -214,556 P9.1@-214,561.14
  Bottom Layer w10: D14.2@-394.52,555 -220.14,555 P9.1@-214,561.14
4857_P: D16.2 F13.1 P9.2 | length 362.7
  Top Layer w10: F13.1@-344,451 -298,497 -273,497 -249.86,497 P9.2@-214,461.14
  Bottom Layer w10: D16.2@-394.52,417 -305,417 -260.86,461.14 P9.2@-214,461.14
4858_N: D18.2 F15.1 P11.1 | length 348.9
  Top Layer w10: F15.1@-343,213 -302,172 -280,172 -255,172 P11.1@-214,213
  Bottom Layer w10: D18.2@-394.52,226 -381.52,213 P11.1@-214,213
4858_P: D20.2 F17.1 P11.2 | length 407.7
  Top Layer w10: F17.1@-337,113 -298,152 -280,152 -253,152 P11.2@-214,113
  Bottom Layer w10: D20.2@-394.52,81 -340,81 ; D20.2@-363.51,66.18 cw(c-340,54.95) -340,81 ; D20.2@-363.51,95.82 ccw(c-340,107.05) -340,81 ; P11.2@-214,113 -308,113 -340,81
AGND: C1.1 C3.1 C5.1 C6.1 C7.1 C9.1 C10.1 C14.2 C18.1 C19.1 C21.1 C23.1 C24.1 C25.1 C27.1 C28.1 C32.1 C68.2 D1.1 D2.1 D3.1 D4.1 D5.1 D6.1 D7.1 D8.1 D13.1 D14.1 D15.1 D16.1 D17.1 D18.1 D19.1 D20.1 Q1.2 Q2.2 Q3.2 Q4.2 Q6.2 Q7.2 Q8.2 Q9.2 R1.1 R8.1 R9.1 R19.1 R37.1 R38.1 R45.1 R46.1 U1.4 U1.5 U2.5 U3.5 U4.5 U5.5 U7.4 U7.5 U8.4 U8.5 U9.4 U9.5 U10.4 U10.5 U11.4 U11.5 U12.4 U13.5 U14.5 U15.4 U15.5 U16.4 U16.5 U17.5 U18.5 | length 1450.8
  Top Layer w20: U12.4@-1856,433 -1764,341 -1764,172 -1630,38 -1307,38 -1257,88 U18.5@-1220.62,88 ; -1276.38,68.62 cw(c-1235.62,27.85) U18.5@-1235.62,85.5 ; -1267.69,77.31 cw(c-1244.88,54.51) U18.5@-1236.29,85.59
  Bottom Layer w20: C14.2@-2010.85,313.59 ccw(c-2027.38,330.12) -2004,330.12 ccw(c-1980.62,330.12) C14.2@-1997.15,313.59 ; C14.2@-1991.25,299.89 cw(c-1974.71,283.36) -1974.71,306.74 cw(c-1974.71,330.12) C14.2@-1991.25,313.59 ; C14.2@-1985.77,306.74 cw(c-1985.77,237.23) C68.2@-1936.63,286.38 ; C68.2@-1931,289.06 -1948.69,306.74 C14.2@-2004,306.74 -2004,382 -1953,433 U12.4@-1856,433
  other v1: -1185,40 -1243,41 -838,44 -990,58 -1164,74 -660,82 -771,112 -839,116 -1002,127 -786,172 -230,304 -648,314 -537,321 -1100,330 -1028,332 -303,335 -459,339 -927,358 -978,367 -811,382 -991,416 -644,425 -785,481 -989,491 -828,542 -438,654 -561,658 -278,663 -779,671 -1051,694 -981,697 -1095.09,701 -822,730 -880,733 -944,741 -992,777 -630,786 -786,790 -844,795 -1003,827 -804,855 -636,998 -793,1030 -973,1048 -1053,1049 -1112,1051 -836,1073 -919,1080 -987,1108 -636,1133 -842,1150 -797,1161 -993,1183 -795,1226 -537,1341 -261,1346 -644,1356 -389,1365 -1122,1369 -1014,1392 -825,1416 -893,1424 -970,1429 -796,1497 -845,1500 -1000,1514 -817,1568 -1108,1709 -996,1733 -805,1743 -911,1767 -841.53,1767.19 -991,1811 -766,1835 -641,1842 -786,1913 -625,2057 -855,2091 -1111,2102 -984,2102 -1047,2104 -776,2105 -919,2118 -829,2127 -987,2169 -658,2194 -837,2196 -776,2228 -1278,2268.07 -816,2287 -274,2384 -630,2431 -241,2447 -521,2452 -431,2455 -313,2455 -982,2457 -804,2483 -875,2484 -993,2526 -632,2535 -830,2551 -792,2612 -287,2681 -306,2746 -677,2781 -321,2787 -759,2790 -428,2796 -515,2801 -603,2816 -1025,2820 -944,2825 -823,2825
BOOT: R32.2 U6.21 | length 551
  Top Layer w8: v1(-2334,1535) -2293,1535 -2288,1540 -2266,1540 -2239.69,1540 U6.21@-2239.05,1540.64 ; v1@-2329.76,1530.76 cw(c-2319.51,1520.51) -2319.51,1535 cw(c-2319.51,1549.49) v1@-2329.76,1539.24
  Top Layer w10: R32.2@-2339.15,1866.19 cw(c-2351.59,1853.75) -2334,1853.75 ; v1@-2337.54,1827.54 ccw(c-2346.07,1836.07) -2334,1836.07 ccw(c-2321.93,1836.07) v1@-2330.46,1827.54 ; v1(-2334,1824) -2334,1874.29 R32.2@-2332.94,1875.35 ; -2334,1848.65 cw(c-2309.2,1848.65) R32.2@-2326.74,1866.19
  Bottom Layer w10: v1@-2337.54,1538.54 ccw(c-2346.07,1547.07) -2334,1547.07 ccw(c-2321.93,1547.07) v1@-2330.46,1538.54 ; v1@-2337.54,1820.46 cw(c-2346.07,1811.93) -2334,1811.93 cw(c-2321.93,1811.93) v1@-2330.46,1820.46 ; v1(-2334,1535) v1(-2334,1824)
DEBUG: LED8.2 U6.47 | length 186.8
  Top Layer w8: U6.47@-1994.95,1650.88 -1896.12,1650.88 -1882,1665 LED8.2@-1882,1695.94 ; LED8.2@-1888.92,1689.03 cw(c-1905.61,1672.34) -1882,1672.34 cw(c-1858.39,1672.34) LED8.2@-1875.08,1689.03
EARTH: 
GND: C2.1 C4.1 C8.1 C11.1 C12.2 C13.2 C15.1 C16.1 C17.1 C20.1 C22.1 C26.1 C29.1 C30.2 C31.1 C65.2 C66.2 D9.1 D10.1 D11.1 J1.1 J1.A1 J1.A12 J1.B1 J1.B12 P5.1 P6.4 P7.1 Q5.1 R16.2 U2.4 U3.4 U4.4 U5.4 U6.17 U6.49 U12.2 U13.4 U14.4 U17.4 U18.4 U19.1 | length 195.8
  Top Layer w10: U6.17@-2239.05,1603.62 -2140.62,1603.62 U6.49@-2116.95,1579.95 ; U6.49@-2180.29,1603.62 ccw(c-2180.29,1644.29) U6.49@-2151.54,1615.54 ; U6.49@-2156.15,1603.62 ccw(c-2156.15,1620.15) U6.49@-2144.46,1608.46 ; U6.49@-2148,1607 cw(c-2148,1597.34) U6.49@-2141.17,1604.17 ; U6.49@-2143,1612 ccw(c-2128.51,1612) U6.49@-2138.76,1601.76
  other v1: -1597,74 -1889,125 -2117,137 -2437,138 -1954,145 -2015,149 -2479,171 -2514,210 -2112,210 -2520,261 -2324,263 -1599,282 -2091,284 -2365,298 -1677,352 -1496,355 -2369,369 -1585,384 -1452,395 -1505,410 -1664,456 -2122,468 -1910,524 -2146,564 -1951,570 -2056.79,575 -2123,632 -1655,632 -2121,675 -1588,708 -1486,723 -1649,751 -2482,760 -1525,761 -2323,796 -1651,797 -2285,844 -2489,852 -2351,859 -2320,915 -2203,929 -2074,940 -1880,943 -2383,949 -1830,950 -2331,968 -2467,976 -1579,981 -1888,1015 -1837,1036 -1622,1040 -1520,1040 -1579,1106 -1503,1115 -1903,1187 -1644,1346 -1548,1380 -1414,1427 -2301,1431 -1482,1444 -2336,1471 -2514,1472 -2446,1504 -1809,1560 -1725,1560 -2148,1562 -2090,1565 -1926,1572 -2148,1612 -2086,1613 -1509,1736 -1713,1744 -1443,1752 -1516,1813 -1976,1836 -1713,1900 -1847,1904 -1576,1913 -1589,1991 -1871,2033 -2052,2037 -1502,2057 -1525,2100 -1568,2103 -1439,2145 -1503,2174 -2237,2176 -2210,2224 -1687,2271 -1653,2347 -1685,2364 -2065,2373 -1641,2402 -1990,2410 -2089,2449 -1620,2480 -1440,2498 -2211,2595 -2338,2639